# Altium PCB LED_Ring_80mm.pcbdoc (part 3 of 3)
Units mm, origin at the board's own origin, x right, y up, seen from the top; angles counter-clockwise.
Board outline 95 x 95 mm, 2 copper layers (Top Layer, Bottom Layer), stack 1.071 mm thick; 20 components, 18 nets, 2525 pads, 18 vias.
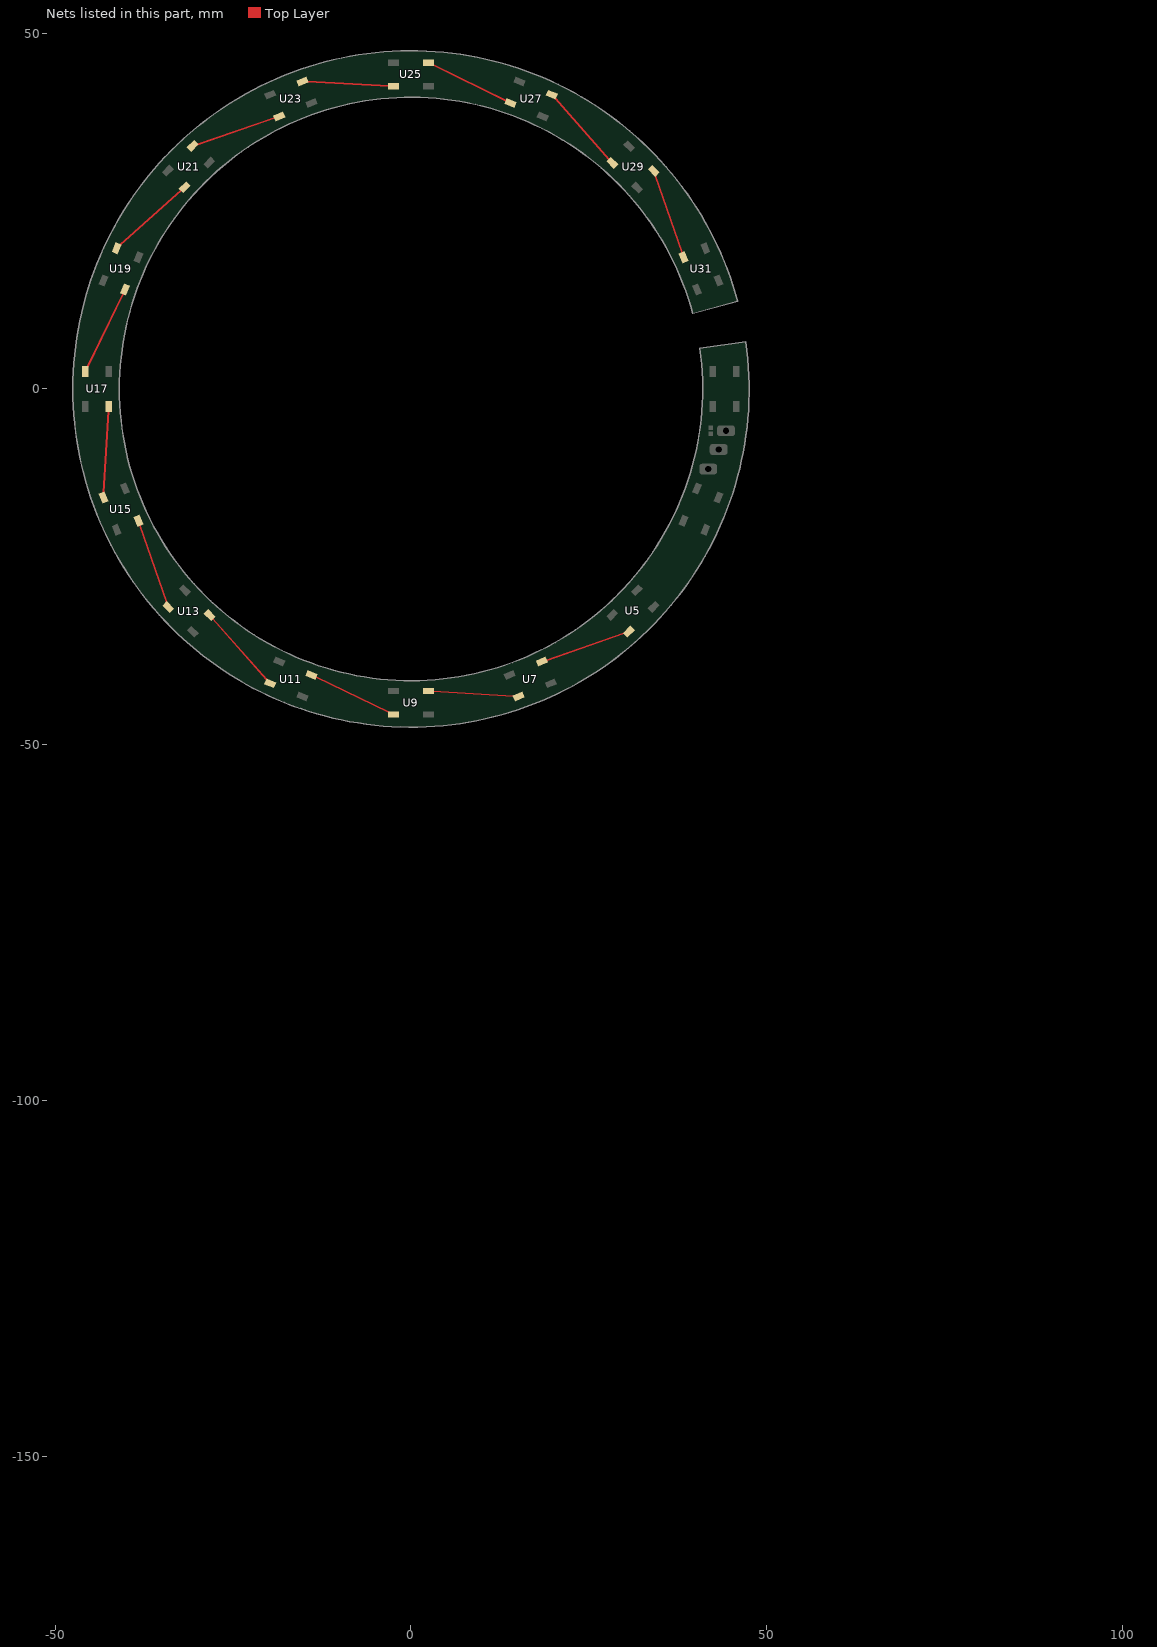
[diagram p3: the nets of this part, all layers, seen from the top]

## Via types
v1: diameter 0.85, hole 0.5, Top Layer to Bottom Layer, tented both sides, 18 vias

## Nets (pads, with @x,y where several pads share a name; then routed paths per layer and width w, separated by ;. In a path a pad name is that pad's centre, name@x,y a point inside that pad or via, vN(x,y) a via of type N, cw(c..) or ccw(c..) an arc to the next point about the centre after c; other vN are vias at no path point) (continued)
NetU5_2: U5.2 U7.4 | length 12.9
  Top Layer w0.254: U7.4@18.382,-38.288 ccw(c18.489,-38.058) 18.563,-38.301 18.574,-38.297 U7.4@18.998,-38.148 ; U7.4@18.999,-38.148 29.949,-34.294 U5.2@30.6,-34.065
NetU7_2: U7.2 U9.4 | length 12.7
  Top Layer w0.254: U9.4@2.45,-42.425 3.073,-42.464 3.081,-42.464 U7.2@14.425,-43.169 ; U7.2@14.426,-43.169 U7.2@15.118,-43.212
NetU9_2: U9.2 U11.4 | length 12.8
  Top Layer w0.254: U11.4@-13.98,-40.163 -13.418,-40.434 -3.073,-45.424 U9.2@-2.45,-45.725
NetU11_2: U11.2 U13.4 | length 12.8
  Top Layer w0.254: U13.4@-28.299,-31.763 -27.884,-32.23 -27.879,-32.235 -20.232,-40.818 -20.23,-40.819 U11.2@-19.77,-41.337
NetU13_2: U13.2 U15.4 | length 12.8
  Top Layer w0.254: U15.4@-38.288,-18.507 -38.084,-19.097 -34.323,-29.977 U13.2@-34.097,-30.632
NetU15_2: U15.2 U17.4 | length 12.8
  Top Layer w0.254: U15.2@-43.212,-15.243 -43.17,-14.551 -43.171,-14.55 -42.486,-3.08 -42.486,-3.073 U17.4@-42.448,-2.45
NetU17_2: U17.2 U19.4 | length 12.8
  Top Layer w0.254: U17.2@-45.748,2.45 -45.446,3.073 -40.435,13.418 U19.4@-40.163,13.98
NetU19_2: U19.2 U21.4 | length 12.8
  Top Layer w0.254: U19.2@-41.337,19.77 -40.821,20.231 -40.82,20.234 -32.268,27.913 -32.263,27.918 U21.4@-31.799,28.334
NetU21_2: U21.2 U23.4 | length 12.9
  Top Layer w0.254: U21.2@-30.668,34.132 -30.011,34.357 -19.098,38.086 U23.4@-18.507,38.288
NetU23_2: U23.2 U25.4 | length 12.8
  Top Layer w0.254: U23.2@-15.243,43.212 -14.553,43.173 -14.549,43.175 U25.4@-3.074,42.559 ; U25.4@-3.073,42.559 U25.4@-2.45,42.525
NetU25_2: U25.2 U27.4 | length 12.8
  Top Layer w0.254: U25.2@2.45,45.825 3.073,45.519 13.42,40.438 U27.4@13.98,40.163
NetU27_2: U27.2 U29.4 | length 12.8
  Top Layer w0.254: U27.2@19.77,41.337 20.23,40.819 20.231,40.818 U29.4@27.876,32.224 ; U29.4@27.877,32.223 U29.4@28.292,31.757
NetU29_2: U29.2 U31.4 | length 12.8
  Top Layer w0.254: U29.2@34.09,30.625 34.317,29.971 38.084,19.097 U31.4@38.288,18.507
pads on no net: U31.2

## Polygon pours and split planes (outlines as drawn)
GND on Bottom Layer "GND_L02_P001" (solid, remove dead copper, pour order 1): -47.5,0 ccw(c0,0) 47.038,6.611 40.569,5.702 cw(c0,0) -40.968,0 cw(c0,0) 39.572,10.603 45.881,12.294 ccw(c0,0)
+5V on Top Layer "+5V_L01_P000" (solid, remove dead copper, pour order 0): -47.5,0 ccw(c0,0) 47.038,6.611 40.569,5.702 cw(c0,0) -40.968,0 cw(c0,0) 39.572,10.603 45.881,12.294 ccw(c0,0)

## Silkscreen, mask and mechanical layers (free items; w line width, h text height)
Bottom Overlay:
  drawing of 680 lines, arcs and shapes, not listed
  text "VSS" at 42.688,-3.875 h1.52 r90
  text "Designed in Canada" at -44.386,-5.875 h1.27 r270
  text "DIN" at 45.812,-7.313 h1.52 r90
  text "+5V" at 44.312,-10 h1.52 r90
  text "PCB Revision '.VarRevNo'" at -27.375,-35 h1.52 r315
  text "Licensed under CERN-OHL-S v2" at 2.338,-43.119 h1.27
  text "FlexiRing 80" at 2.338,-44.504 h1.52
Mechanical 1:
  circle w0.75: c0,0 r47.5
  circle w0.75: c0,0 r41
  lines w0.127: -55.433,-22.961 0,0 ; -55.433,22.961 0,0 ; -23.015,-55.472 -0.054,-0.04 ; -23.003,55.475 -0.042,0.042 ; -0.162,0.014 55.27,-22.947 ; -0.108,0.014 22.853,-55.418 ; -0.008,0.008 22.953,55.441 ; 55.433,22.961 0,0
Mechanical 6:
  the board outline again, w0.75
Mechanical 7:
  drawing of 1329 lines, arcs and shapes, not listed
  text "1" at -155.407,82.317 h3.05
  text "2" at -83.636,82.317 h3.05
  text "3" at -11.881,82.317 h3.05
  text "4" at 60.281,82.317 h3.05
  text "5" at 132.264,82.317 h3.05
  text "6" at 204.273,82.317 h3.05
  text "A" at -189.096,50.744 h3.05
  text "A" at 237.812,49.273 h3.05
  text "B" at -189.096,-18.699 h3.05
  text "B" at 237.917,-19.421 h3.05
  text "C" at -189.096,-89.337 h3.05
  text "ENGINEER:" at 122.689,-160.634 h3.05
  text "TITLE:" at 160.789,-160.634 h3.05
  text "D" at -189.096,-161.015 h3.05
  text "D" at 237.624,-161.015 h3.05
  text "Andrew Marles" at 124.441,-163.987 h3.05
  text "Expatria" at 80.304,-165.434 h2.54
  text "PCB DESIGNER:" at 122.689,-168.127 h3.05
  text ".Title" at 164.382,-168.204 h5.08
  text "Technologies" at 85.804,-169.434 h1.52
  text "Copyright Expatria Technologies 2022. This document" at -35.09,-170.502 h3.05
  text "Andrew Marles" at 124.147,-171.186 h3.05
  text "describes Open Hardware and is licensed under the" at -35.09,-173.042 h3.05
  text "CERN-OHL-S v2. No warranty is implied or expressed." at -35.09,-175.582 h3.05
  text "DATE:" at 122.689,-175.874 h3.05
  text "PART NO.:" at 160.789,-175.874 h3.05
  text "REV:" at 214.129,-175.874 h3.05
  text ".PRINT_DATE" at 123.959,-178.922 h3.05
  text "'.VarRevNo'" at 221.17,-178.935 h3.05
  text "'.PCBPARTNO'_'.PCBREVNO'" at 172.275,-178.986 h3.05
  text "Expatria Technologies Inc." at 72.399,-179.385 h3.05
  text "1136 Glade Court" at 72.585,-182.578 h3.05
  text "FILE NAME:" at 122.689,-183.494 h3.05
  text "DWG NO:" at 160.789,-183.494 h3.05
  text "SCALE:" at 214.129,-183.494 h3.05
  text "Port Coquitlam, BC, Canada V3B 1R5" at 72.331,-185.753 h3.05
  text ".Print_Scale" at 216.44,-186.339 h3.05
  text ".PCB_FILE_NAME_NO_PATH" at 123.959,-186.542 h3.05
  text "1" at -155.407,-192.003 h3.05
  text "2" at -83.636,-192.003 h3.05
  text "3" at -11.881,-192.003 h3.05
  text "4" at 60.281,-192.003 h3.05
  text "5" at 132.264,-192.003 h3.05
  text "6" at 204.273,-192.003 h3.05
Drill Drawing:
  circle w0.254: c68.025,-127.863 r0.847
  lines w0.152: 99.884,70.561 195.684,70.561
  lines w0.254: 67.179,-132.52 68.872,-132.52 68.872,-130.826 67.179,-130.826 67.179,-132.52
  lines w0.381: 65.66,-133.663 219.44,-133.663 ; 65.66,-126.043 219.44,-126.043 ; 79.652,-137.473 79.652,-122.233 ; 93.111,-137.473 93.111,-122.233 ; 121.043,-137.473 121.043,-122.233 ; 133.892,-137.473 133.892,-122.233 ; 152.53,-137.473 152.53,-122.233 ; 190.619,-137.473 190.619,-122.233 ; 65.66,-137.473 219.44,-137.473 219.44,-122.233 65.66,-122.233 65.66,-137.473
  text "NOTES: UNLESS OTHERWISE SPECIFIED, ALL DIMENSIONS ARE IN INCHES." at 99.494,73.507 h2.54
  text "1. MATERIAL: EPOXY GLASS FR-4 UL94V-0 HIGHEST IN STOCK AVAILABLE Tg." at 99.494,67.157 h2.54
  text "FABRICATE PCB IN ACCORDANCE WITH IPC-6012, CLASS2; PER IPC-6011." at 103.304,64.617 h2.54
  text "2. HOLE LOCATION TOLERANCE +/- .003 DIAMETER OF TRUE POSITION." at 99.494,59.537 h2.54
  text "ARTWORK REGISTRATION FRONT TO BACK +/- .003" at 103.304,56.997 h2.54
  text "3. ALL PLATED THROUGH HOLES TO HAVE A MINIMUM PLATING OF .0007 COPPER." at 99.494,53.187 h2.54
  text "ANNULAR RING TO BE .001 MIN.  VIA HOLES MAY HAVE A .001 ANNULAR RING." at 103.304,50.647 h2.54
  text "TEARDROPS MAY BE ADDED TO AVOID DRILL BREAKOUT." at 103.304,48.107 h2.54
  text "4. LPI (LIQUID PHOTO IMAGABLE) SOLDERMASK PER IPC-SM-840, TYPE B, CLASS H" at 99.712,41.461 h2.54
  text "BOTH SIDES, COLOR: ORANGE WITH MAXIMUM MISREGISTRATION" at 103.522,38.921 h2.54
  text "TO BE .003 OVER BARE COPPER.  ALL EXPOSED COPPER AREAS, BOTH SIDES" at 103.522,36.381 h2.54
  text "TO BE PLATED 2-6 MICROINCHES ELECTROLESS GOLD OVER 120 MICROINCHES" at 103.522,33.841 h2.54
  text "ELECTROLESS NICKEL.  MANUFACTURER MAY MODIFY SOLDERMASK TO REMOVE" at 103.522,31.301 h2.54
  text "ANY SLIVERS THAT ARE .004 OR LESS BETWEEN FINE PITCHED LANDS." at 103.522,28.761 h2.54
  text "5. SILKSCREEN BOTH SIDES USING WHITE EPOXY INK.  MANUFACTURER MUST MODIFY" at 99.966,24.443 h2.54
  text "SLIKSCREEN IMAGE TO REMOVE ANY WHITE EPOXY INK FROM EXPOSED METAL." at 103.776,21.903 h2.54
  text "6. IF REQUIRED, MAXIMUM RADIUS ON ALL INSIDE CORNERS TO BE .025" at 99.573,18.149 h2.54
  text "7. MANUFACTURER TO MARK BOARD WITH COPPER OR WHITE EPOXY INK, IN AN" at 99.573,15.074 h2.54
  text "OPEN AREA ON BOTTOM SIDE, DESIGNATED WITH A DATE CODE INDICATING" at 103.776,12.478 h2.54
  text "YEAR AND WEEK OF FABRICATION, 4 DIGIT FORMAT" at 103.383,9.994 h2.54
  text "8. FINISHED BOARD TO COMPLY WITH PHYSICAL AND ENVIRONMENTAL REQUIREMENTS" at 99.573,6.184 h2.54
  text "OF IPC-A-600. BOW AND TWIST PER 10-3, CLASS 2, MULTI AND UL796" at 103.383,3.644 h2.54
  text "9. REFERENCE ONLY: APPROXIMATE MINIMUM LINE IS .004 AND SPACE IS .004" at 98.594,-0.502 h2.54
  text "10. UNLESS OTHERWISE SPECIFIED, BOARD SHALL BE .062 NOMINAL THICKNESS" at 98.594,-4.312 h2.54
  text "Symbol" at 67.946,-124.9 h1.83
  text "Count" at 80.795,-124.9 h1.83
  text "Hole Size" at 94.254,-124.9 h1.83
  text "Plated" at 122.186,-124.9 h1.83
  text "Hole Type" at 135.035,-124.9 h1.83
  text "Drill Layer Pair" at 153.673,-124.9 h1.83
  text "Pad Shape" at 191.762,-124.9 h1.83
  text "18" at 80.795,-128.71 h1.52
  text "19.69mil (0.500mm)" at 94.254,-128.71 h1.52
  text "PTH" at 122.186,-128.71 h1.52
  text "Round" at 135.035,-128.71 h1.52
  text "Top Layer - Bottom Layer" at 153.673,-128.71 h1.52
  text "Rounded" at 191.762,-128.71 h1.52
  text "3" at 80.795,-132.52 h1.52
  text "35.00mil (0.889mm)" at 94.254,-132.52 h1.52
  text "PTH" at 122.186,-132.52 h1.52
  text "Round" at 135.035,-132.52 h1.52
  text "Top Layer - Bottom Layer" at 153.673,-132.52 h1.52
  text "Rounded Rectangle" at 191.762,-132.52 h1.52
  text "21 Total" at 80.795,-136.33 h1.52